# Altium PCB mpll31.PcbDoc (part 2 of 4)
Units mil, origin at the board's own origin, x right, y up, seen from the top; angles counter-clockwise.
Board outline 3925 x 3925 mil, 2 copper layers (TopLayer, BottomLayer); 92 components, 107 nets, 905 pads, 24 vias.
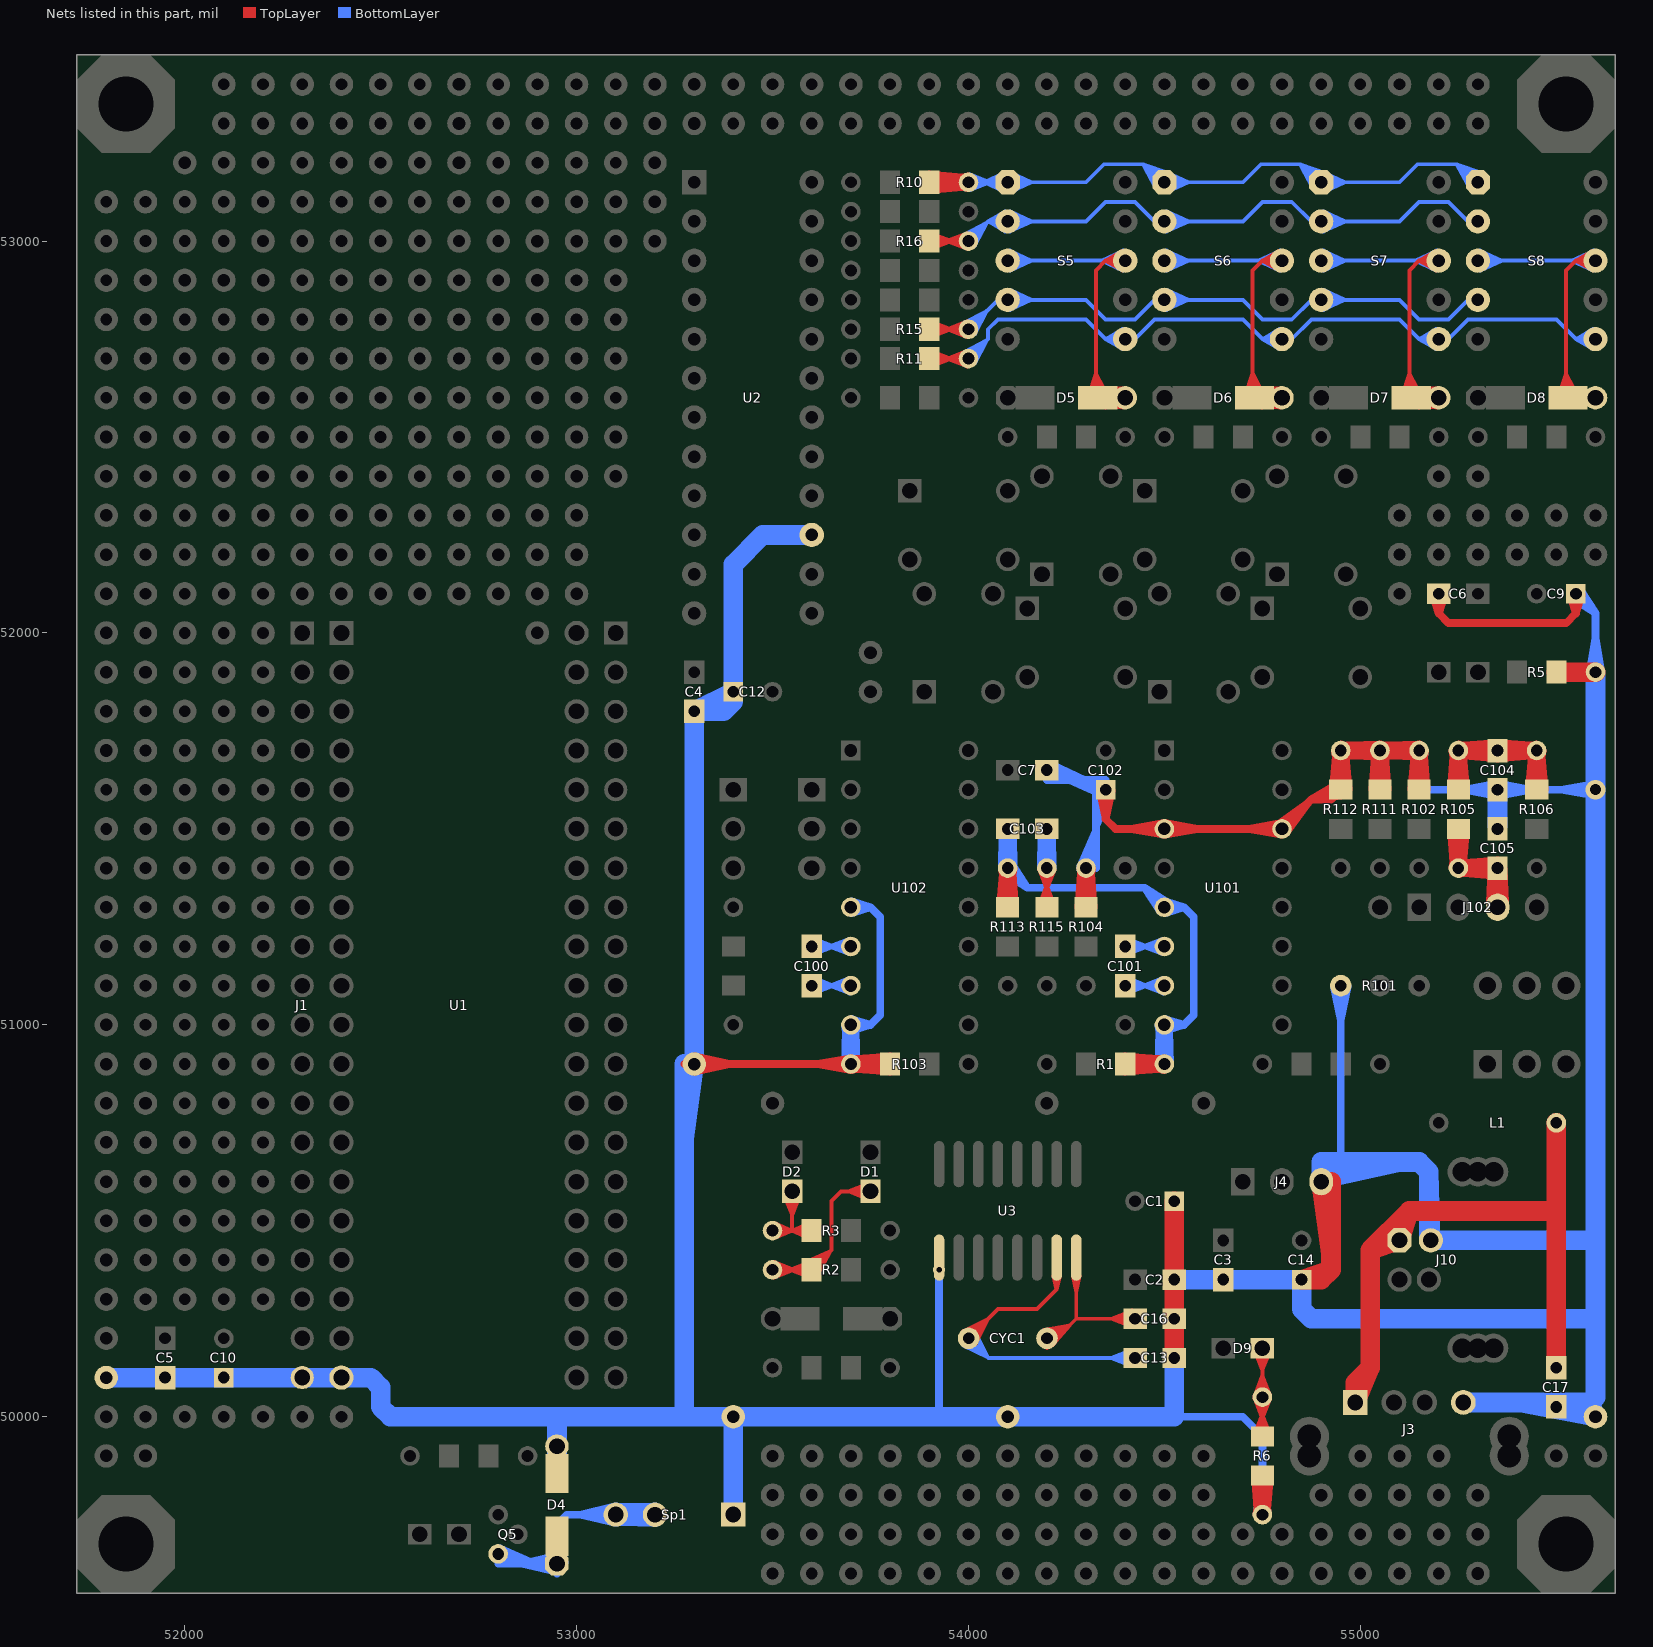
[diagram p2: the nets of this part, all layers, seen from the top]

## Via types
v1: diameter 50, hole 28, TopLayer to BottomLayer, 12 vias
v2: diameter 30, hole 14, TopLayer to BottomLayer, 8 vias
v3: diameter 40, hole 28, TopLayer to BottomLayer, 4 vias

## Nets (pads, with @x,y where several pads share a name; then routed paths per layer and width w, separated by ;. In a path a pad name is that pad's centre, name@x,y a point inside that pad or via, vN(x,y) a via of type N, cw(c..) or ccw(c..) an arc to the next point about the centre after c; other vN are vias at no path point) (continued)
DP: R11.2 R11.4 S5.6 S6.6 S7.6 S8.6 | length 4480.5
  TopLayer w10: R11.4@53900,52700 R11.2@54000,52700 53945,52700 ; R11.4@53901.01,52689.46 53955.59,52700 ; R11.4@53901.01,52710.54 53955.59,52700 ; R11.4@53903.81,52679.77 53955.59,52700 ; R11.4@53903.81,52720.23 53955.59,52700 ; R11.2@53996.36,52680.33 53945,52700 ; R11.2@53996.36,52719.67 53945,52700 ; R11.2@53999.09,52690.04 53945,52700 ; R11.2@53999.09,52709.96 53945,52700
  BottomLayer w10: R11.2@53988.19,52716.14 54046.21,52746.21 ; R11.2@53993.49,52707.59 54046.21,52746.21 ; R11.2@54000,52700 54050,52750 54050,52775 54075,52800 54300,52800 54350,52750 ; R11.2@54007.59,52693.49 54046.21,52746.21 ; R11.2@54016.14,52688.19 54046.21,52746.21 ; S5.6@54393.24,52724.89 54350,52750 ; S5.6@54393.24,52775.11 54350,52750 ; S5.6@54397.44,52734.21 54350,52750 ; S5.6@54397.44,52765.79 54350,52750 ; S5.6@54399.64,52744.01 54350,52750 ; S5.6@54399.64,52755.99 54350,52750 ; S6.6@54793.24,52724.89 54750,52750 ; S6.6@54793.24,52775.11 54750,52750 ; S6.6@54797.44,52734.21 54750,52750 ; S6.6@54797.44,52765.79 54750,52750 ; S6.6@54799.64,52744.01 54750,52750 ; S6.6@54799.64,52755.99 54750,52750 ; S8.6@55593.24,52724.89 55550,52750 ; S8.6@55593.24,52775.11 55550,52750 ; S8.6@55597.44,52734.21 55550,52750 ; S8.6@55597.44,52765.79 55550,52750 ; S8.6@55599.64,52744.01 55550,52750 ; S8.6@55599.64,52755.99 55550,52750 ; S8.6@55600,52750 55550,52750 ; 54350,52750 S5.6@54400,52750 ; 54350,52750 S5.6@54400,52750 ; S5.6@54400,52750 54425,52750 54475,52800 54700,52800 54750,52750 ; 54750,52750 S6.6@54800,52750 ; 54750,52750 S6.6@54800,52750 ; S6.6@54800,52750 54825,52750 54875,52800 55100,52800 ; 55100,52800 55150,52750 ; 55100,52800 55150,52750 ; 55150,52750 S7.6@55200,52750 ; 55150,52750 55199.64,52755.99 55150,52750 ; 55150,52750 55199.64,52744.01 55150,52750 ; 55150,52750 55197.44,52765.79 55150,52750 ; 55150,52750 55197.44,52734.21 55150,52750 ; 55150,52750 55193.24,52775.11 55150,52750 ; 55150,52750 55193.24,52724.89 55150,52750 ; 55150,52750 S7.6@55200,52750 ; 55150,52750 S7.6@55200,52750 ; 55150,52750 S7.6@55200,52750 ; S7.6@55200,52750 55225,52750 55275,52800 55500,52800 55550,52750
E: R15.2 R15.4 S5.4 S6.4 S7.4 S8.4 | length 3282.1
  TopLayer w10: R15.4@53900,52775 R15.2@54000,52775 ; R15.4@53901.01,52764.46 53955.59,52775 ; R15.4@53901.01,52785.54 53955.59,52775 ; R15.4@53903.81,52754.77 53955.59,52775 ; R15.4@53903.81,52795.23 53955.59,52775 ; R15.2@53996.36,52755.33 53945,52775 ; R15.2@53996.36,52794.67 53945,52775 ; R15.2@53999.09,52765.04 53945,52775 ; R15.2@53999.09,52784.96 53945,52775
  BottomLayer w10: R15.2@53988.19,52791.14 54046.21,52821.21 ; R15.2@53993.49,52782.59 54046.21,52821.21 ; R15.2@54000,52775 54075,52850 S5.4@54100,52850 54300,52850 54350,52800 54425,52800 S6.4@54475,52850 ; R15.2@54007.59,52768.49 54046.21,52821.21 ; R15.2@54016.14,52763.19 54046.21,52821.21 ; S5.4@54100.3,52844.01 54161,52850 ; S5.4@54100.3,52855.99 54161,52850 ; S5.4@54102.1,52834.14 54161,52850 ; S5.4@54102.1,52865.86 54161,52850 ; S5.4@54105.54,52824.6 54161,52850 ; S5.4@54105.54,52875.4 54161,52850 ; S6.4@54500,52850 54700,52850 54750,52800 54825,52800 S7.4@54875,52850 ; S6.4@54500.3,52844.01 54561,52850 ; S6.4@54500.3,52855.99 54561,52850 ; S6.4@54502.1,52834.14 54561,52850 ; S6.4@54502.1,52865.86 54561,52850 ; S6.4@54505.54,52824.6 54561,52850 ; S6.4@54505.54,52875.4 54561,52850 ; S7.4@54900,52850 55100,52850 55150,52800 55225,52800 S8.4@55275,52850 ; S7.4@54900.3,52844.01 54961,52850 ; S7.4@54900.3,52855.99 54961,52850 ; S7.4@54902.1,52834.14 54961,52850 ; S7.4@54902.1,52865.86 54961,52850 ; S7.4@54905.54,52824.6 54961,52850 ; S7.4@54905.54,52875.4 54961,52850
F: R16.2 R16.4 S5.2 S6.2 S7.2 S8.2 | length 3721.8
  TopLayer w10: R16.4@53900,53000 R16.2@54000,53000 ; R16.4@53901.01,52989.46 53955.59,53000 ; R16.4@53901.01,53010.54 53955.59,53000 ; R16.4@53903.81,52979.77 53955.59,53000 ; R16.4@53903.81,53020.23 53955.59,53000 ; R16.2@53996.36,52980.33 53945,53000 ; R16.2@53996.36,53019.67 53945,53000 ; R16.2@53999.09,52990.04 53945,53000 ; R16.2@53999.09,53009.96 53945,53000
  BottomLayer w10: R16.2@53988.19,53016.14 54046.21,53046.21 ; R16.2@53993.49,53007.59 54046.21,53046.21 ; R16.2@54000,53000 54050,53050 ; R16.2@54007.59,52993.49 54046.21,53046.21 ; R16.2@54016.14,52988.19 54046.21,53046.21 ; S5.2@54075,53050 S5.2@54100,53050 ; S5.2@54093.24,53024.89 54050,53050 ; S5.2@54093.24,53075.11 54050,53050 ; S5.2@54097.44,53034.21 54050,53050 ; S5.2@54097.44,53065.79 54050,53050 ; S5.2@54099.64,53044.01 54050,53050 ; S5.2@54099.64,53055.99 54050,53050 ; S5.2@54100.3,53044.01 54161,53050 ; S5.2@54100.3,53055.99 54161,53050 ; S5.2@54102.1,53034.14 54161,53050 ; S5.2@54102.1,53065.86 54161,53050 ; S5.2@54105.54,53024.6 54161,53050 ; S5.2@54105.54,53075.4 54161,53050 ; S6.2@54500.3,53044.01 54561,53050 ; S6.2@54500.3,53055.99 54561,53050 ; S6.2@54502.1,53034.14 54561,53050 ; S6.2@54502.1,53065.86 54561,53050 ; S6.2@54505.54,53024.6 54561,53050 ; S6.2@54505.54,53075.4 54561,53050 ; S7.2@54900.3,53044.01 54961,53050 ; S7.2@54900.3,53055.99 54961,53050 ; S7.2@54902.1,53034.14 54961,53050 ; S7.2@54902.1,53065.86 54961,53050 ; S7.2@54905.54,53024.6 54961,53050 ; S7.2@54905.54,53075.4 54961,53050 ; S8.2@55300,53050 55275,53050 55225,53100 55150,53100 55100,53050 S7.2@54900,53050 54875,53050 54825,53100 54750,53100 54700,53050 S6.2@54500,53050 54475,53050 54425,53100 54350,53100 54300,53050 S5.2@54100,53050 ; 54050,53050 S5.2@54100,53050 ; 54050,53050 S5.2@54100,53050
G: R10.2 R10.4 S5.1 S6.1 S7.1 S8.1 | length 5558.1
  TopLayer w20: R10.4@53899.85,53130.47 R10.2@53985.17,53137.47 ; R10.4@53899.85,53169.53 R10.2@53985.17,53162.53 ; R10.4@53900,53146.06 R10.2@53985.17,53137.47 ; R10.4@53900,53150 R10.2@54000,53150 ; R10.4@53900,53153.94 R10.2@53985.17,53162.53 ; R10.4@53901.42,53134.47 53985.59,53150 R10.4@53901.42,53165.53 ; R10.4@53902.97,53138.63 R10.2@53985.17,53162.53 ; R10.4@53902.97,53161.37 R10.2@53985.17,53137.47 ; R10.2@53998.68,53135.06 53915,53150 R10.2@53998.68,53164.94
  BottomLayer w10: R10.2@54000,53150 S5.1@54100,53150 ; R10.2@54000.91,53140.04 54055,53150 ; R10.2@54000.91,53159.96 54055,53150 ; R10.2@54003.64,53130.33 54055,53150 ; R10.2@54003.64,53169.67 54055,53150 ; S5.1@54092,53150 S5.1@54100,53150 ; S5.1@54094.46,53124.6 54039,53150 ; S5.1@54094.46,53175.4 54039,53150 ; S5.1@54097.9,53134.14 54039,53150 ; S5.1@54097.9,53165.86 54039,53150 ; S5.1@54099.7,53144.01 54039,53150 ; S5.1@54099.7,53155.99 54039,53150 ; S5.1@54100.3,53144.01 54161,53150 ; S5.1@54100.3,53155.99 54161,53150 ; S5.1@54102.1,53134.14 54161,53150 ; S5.1@54102.1,53165.86 54161,53150 ; S5.1@54105.54,53124.6 54161,53150 ; S5.1@54105.54,53175.4 54161,53150 ; S6.1@54479.8,53133.63 54446.02,53195.98 ; S6.1@54488.32,53139.07 54446.02,53195.98 ; S6.1@54495.92,53145.6 54446.02,53195.98 ; S6.1@54500.3,53144.01 54561,53150 ; S6.1@54500.3,53155.99 54561,53150 ; S6.1@54502.1,53134.14 54561,53150 ; S6.1@54502.1,53165.86 54561,53150 ; S6.1@54503.69,53154.73 54446.02,53195.98 ; S6.1@54505.54,53124.6 54561,53150 ; S6.1@54505.54,53175.4 54561,53150 ; S6.1@54508.93,53163.27 54446.02,53195.98 ; S6.1@54512.94,53172.55 54446.02,53195.98 ; S7.1@54879.8,53133.63 54846.02,53195.98 ; S7.1@54888.32,53139.07 54846.02,53195.98 ; S7.1@54895.92,53145.6 54846.02,53195.98 ; S7.1@54900.3,53144.01 54961,53150 ; S7.1@54900.3,53155.99 54961,53150 ; S7.1@54902.1,53134.14 54961,53150 ; S7.1@54902.1,53165.86 54961,53150 ; S7.1@54903.69,53154.73 54846.02,53195.98 ; S7.1@54905.54,53124.6 54961,53150 ; S7.1@54905.54,53175.4 54961,53150 ; S7.1@54908.93,53163.27 54846.02,53195.98 ; S7.1@54912.94,53172.55 54846.02,53195.98 ; S8.1@55279.8,53133.63 55246.02,53195.98 ; S8.1@55288.32,53139.07 55246.02,53195.98 ; S8.1@55295.92,53145.6 55246.02,53195.98 ; S8.1@55303.69,53154.73 55246.02,53195.98 ; S8.1@55308.93,53163.27 55246.02,53195.98 ; S8.1@55312.94,53172.55 55246.02,53195.98 ; S5.1@54100,53150 54300,53150 54346,53196 54446,53196 ; 54446.02,53195.98 S6.1@54500,53150 ; 54446,53196 54492,53150 S6.1@54500,53150 ; S6.1@54500,53150 54700,53150 54746,53196 54750,53196 54846,53196 ; 54846.02,53195.98 S7.1@54900,53150 ; 54846,53196 S7.1@54892,53150 ; S7.1@54892,53150 S7.1@54900,53150 ; S7.1@54892,53150 S7.1@54900,53150 ; S7.1@54900,53150 55100,53150 55146,53196 55150,53196 55246,53196 ; 55246.02,53195.98 S8.1@55300,53150 55292,53150 55246,53196
GND: C1.1 C2.2 C3.2 C4.2 C5.2 C6.2 C7.2 C9.1 C10.1 C12.1 C13.2 C14.1 C16.2 C17.2 C102.1 C103.1 C104.2 C105.2 D4.2 D4.4 J1.20 J3.4 J4.3 J10.4 pad.0@53400,50000 pad.1@54100,50000 pad.30@53300,50900 pad.45@55600,50000 pad.55 R1.2 R1.4 R5.1 R5.3 R6.1 R6.3 R101.1 R102.1 R102.3 R103.1 R103.3 R104.1 R104.3 R111.1 R111.3 R112.1 R112.3 R113.2 R113.4 Sp1.1 U1.20 U2.15 U3.1 U101.3 U101.5 U101.8 U101.14 U102.5 U102.8 | length 37944.9
  TopLayer w20: pad.30@53275,50900 pad.30@53300,50900 R103.1@53700,50900 R103.3@53800,50900 ; pad.30@53302.22,50880.12 53390,50900 pad.30@53302.22,50919.88 ; R103.1@53698.68,50885.06 53615,50900 R103.1@53698.68,50914.94 ; R103.1@53701.32,50885.06 53785,50900 R103.1@53701.32,50914.94 ; R103.3@53797.03,50888.63 R103.1@53714.83,50912.53 ; R103.3@53797.03,50911.37 R103.1@53714.83,50887.47 ; R103.3@53798.58,50884.47 53714.41,50900 R103.3@53798.58,50915.53 ; R103.3@53800,50896.06 R103.1@53714.83,50887.47 ; R103.3@53800,50903.94 R103.1@53714.83,50912.53 ; R103.3@53800.15,50880.47 R103.1@53714.83,50887.47 ; R103.3@53800.15,50919.53 R103.1@53714.83,50912.53 ; R113.4@54080.47,51299.85 R113.2@54087.47,51385.17 ; R113.4@54084.47,51301.42 54100,51385.59 R113.4@54115.53,51301.42 ; R113.2@54085.06,51398.68 54100,51315 R113.2@54114.94,51398.68 ; R113.4@54088.63,51302.97 R113.2@54112.53,51385.17 ; R113.4@54096.06,51300 R113.2@54087.47,51385.17 ; R113.4@54100,51300 R113.2@54100,51400 ; R113.4@54103.94,51300 R113.2@54112.53,51385.17 ; R113.4@54111.37,51302.97 R113.2@54087.47,51385.17 ; R113.4@54119.53,51299.85 R113.2@54112.53,51385.17 ; R104.3@54280.47,51299.85 R104.1@54287.47,51385.17 ; R104.3@54284.47,51301.42 54300,51385.59 R104.3@54315.53,51301.42 ; R104.1@54285.06,51398.68 54300,51315 R104.1@54314.94,51398.68 ; R104.3@54288.63,51302.97 R104.1@54312.53,51385.17 ; R104.3@54296.06,51300 R104.1@54287.47,51385.17 ; R104.3@54300,51300 R104.1@54300,51400 ; R104.3@54303.94,51300 R104.1@54312.53,51385.17 ; R104.3@54311.37,51302.97 R104.1@54287.47,51385.17 ; R104.3@54319.53,51299.85 R104.1@54312.53,51385.17 ; C102.1@54335.08,51598.5 54350,51525 ; C102.1@54350,51600 54350,51525 ; C102.1@54364.92,51598.5 54350,51525 ; R1.4@54399.85,50880.47 R1.2@54485.17,50887.47 ; R1.4@54399.85,50919.53 R1.2@54485.17,50912.53 ; R1.4@54400,50896.06 R1.2@54485.17,50887.47 ; R1.4@54400,50900 R1.2@54500,50900 ; R1.4@54400,50903.94 R1.2@54485.17,50912.53 ; R1.4@54401.42,50884.47 54485.59,50900 R1.4@54401.42,50915.53 ; R1.4@54402.97,50888.63 R1.2@54485.17,50912.53 ; R1.4@54402.97,50911.37 R1.2@54485.17,50887.47 ; R1.2@54498.68,50885.06 54415,50900 R1.2@54498.68,50914.94 ; U101.3@54498.68,51485.06 54415,51500 U101.3@54498.68,51514.94 ; U101.3@54501.32,51485.06 54585,51500 U101.3@54501.32,51514.94 ; R6.3@54730.47,49850.15 R6.1@54737.47,49764.83 ; R6.3@54734.47,49848.58 54750,49764.41 R6.3@54765.53,49848.58 ; R6.1@54735.06,49751.32 54750,49835 R6.1@54764.94,49751.32 ; R6.3@54738.63,49847.03 R6.1@54762.53,49764.83 ; R6.3@54746.06,49850 R6.1@54737.47,49764.83 ; R6.1@54750,49750 R6.3@54750,49850 ; R6.3@54753.94,49850 R6.1@54762.53,49764.83 ; R6.3@54761.37,49847.03 R6.1@54737.47,49764.83 ; R6.3@54769.53,49850.15 R6.1@54762.53,49764.83 ; U101.14@54790.26,51511.41 54867.43,51567.43 U101.14@54811.41,51490.26 ; U101.14@54798.68,51485.06 54715,51500 U101.14@54798.68,51514.94 ; R112.3@54930.47,51599.85 R112.1@54937.47,51685.17 ; R112.3@54934.47,51601.42 54950,51685.59 R112.3@54965.53,51601.42 ; R112.1@54935.06,51698.68 54950,51615 R112.1@54964.94,51698.68 ; R112.3@54938.63,51602.97 R112.1@54962.53,51685.17 ; R112.3@54939.4,51614.09 54875,51575 ; R112.3@54949.69,51584.84 54875,51575 ; R112.1@54951.32,51685.06 55035,51700 R112.1@54951.32,51714.94 ; R112.3@54953.94,51600 R112.1@54962.53,51685.17 ; R112.3@54961.37,51602.97 R112.1@54937.47,51685.17 ; R112.3@54969.53,51599.85 R112.1@54962.53,51685.17 ; R111.3@55030.47,51599.85 R111.1@55037.47,51685.17 ; R111.3@55034.47,51601.42 55050,51685.59 R111.3@55065.53,51601.42 ; R111.1@55035.06,51698.68 55050,51615 R111.1@55064.94,51698.68 ; R111.3@55038.63,51602.97 R111.1@55062.53,51685.17 ; R111.3@55046.06,51600 R111.1@55037.47,51685.17 ; R111.1@55046.53,51685.41 R112.1@54965.41,51712.43 ; R111.1@55046.53,51714.59 R112.1@54965.41,51687.57 ; R111.1@55048.68,51685.06 54965,51700 R111.1@55048.68,51714.94 ; R111.3@55050,51600 R111.1@55050,51700 ; R111.1@55050.87,51685.03 R112.1@54965.41,51687.57 ; R111.1@55050.87,51714.97 R112.1@54965.41,51712.43 ; R111.1@55051.32,51685.06 55135,51700 R111.1@55051.32,51714.94 ; R111.3@55053.94,51600 R111.1@55062.53,51685.17 ; R111.3@55061.37,51602.97 R111.1@55037.47,51685.17 ; R111.3@55069.53,51599.85 R111.1@55062.53,51685.17 ; R102.3@55130.47,51599.85 R102.1@55137.47,51685.17 ; R102.3@55134.47,51601.42 55150,51685.59 R102.3@55165.53,51601.42 ; R102.1@55135.06,51698.68 55150,51615 R102.1@55164.94,51698.68 ; R102.3@55138.63,51602.97 R102.1@55162.53,51685.17 ; R102.3@55146.06,51600 R102.1@55137.47,51685.17 ; R102.1@55146.53,51685.41 R111.1@55065.41,51712.43 ; R102.1@55146.53,51714.59 R111.1@55065.41,51687.57 ; R102.1@55148.68,51685.06 55065,51700 R102.1@55148.68,51714.94 ; R102.3@55150,51600 R102.1@55150,51700 ; R102.1@55150.87,51685.03 R111.1@55065.41,51687.57 ; R102.1@55150.87,51714.97 R111.1@55065.41,51712.43 ; R102.3@55153.94,51600 R102.1@55162.53,51685.17 ; R102.3@55161.37,51602.97 R102.1@55137.47,51685.17 ; R102.3@55169.53,51599.85 R102.1@55162.53,51685.17 ; C6.2@55184.21,52097.44 55200,52050 ; C6.2@55200,52100 55200,52050 ; C6.2@55215.79,52097.44 55200,52050 ; C9.1@55535.17,52097.75 55550,52050 ; C9.1@55550,52100 55550,52050 ; C9.1@55564.83,52097.75 55550,52050 ; 54350,51525 54375,51500 U101.3@54500,51500 U101.14@54800,51500 54875,51575 ; 54875,51575 54946.06,51600 R112.1@54937.47,51685.17 ; 54875,51575 54925,51575 R112.3@54950,51600 R112.1@54950,51700 R111.1@55050,51700 ; R112.1@54965.41,51687.57 R111.1@55050,51700 ; R112.1@54965.41,51712.43 R111.1@55050,51700 ; R111.1@55050,51700 R102.1@55150,51700 ; R111.1@55065.41,51687.57 R102.1@55150,51700 ; R111.1@55065.41,51712.43 R102.1@55150,51700 ; 55200,52050 55225,52025 55525,52025 55550,52050
  TopLayer w50: C13.2@54525,50150 C1.1@54525,50525 ; C2.2@54525,50375 C1.1@54525,50550 ; J4.3@54900,50595 54925,50409.13 ; J4.3@54925,50600 54925,50375 ; R5.3@55500,51900 R5.1@55600,51900 ; C14.1@54850,50350 54900,50350 ; C14.1@54850,50350 54925,50375 ; C14.1@54850,50350 54900,50350 ; 54900,50350 54925,50375
  BottomLayer w20: R103.1@53685.03,50899.13 U102.8@53687.57,50984.59 ; R103.1@53685.06,50901.32 53700,50985 R103.1@53714.94,50901.32 ; U102.8@53685.06,50998.68 53700,50915 U102.8@53714.94,50998.68 ; R103.1@53685.41,50903.47 U102.8@53712.43,50984.59 ; U102.5@53700,51300 53750,51300 ; U102.8@53702.25,50985.17 53750,51000 ; U102.8@53702.25,51014.83 53750,51000 ; U102.5@53702.25,51285.17 53750,51300 ; U102.5@53702.25,51314.83 53750,51300 ; R103.1@53714.59,50903.47 U102.8@53687.57,50984.59 ; R103.1@53714.97,50899.13 U102.8@53712.43,50984.59 ; 53925,50025 v2(53925,50375) ; C103.1@54084.07,51498.51 54100,51414 C103.1@54115.93,51498.51 ; R113.2@54085.03,51398.98 C103.1@54086.71,51484.48 ; R113.2@54085.06,51401.32 54100,51485 R113.2@54114.94,51401.32 ; R113.2@54085.44,51403.62 C103.1@54113.29,51484.48 ; R113.2@54090.58,51388.33 54150,51350 ; C103.1@54100,51500 R113.2@54100,51400 ; R113.2@54111.67,51409.42 54150,51350 ; R113.2@54114.56,51403.62 C103.1@54086.71,51484.48 ; R113.2@54114.97,51398.98 C103.1@54113.29,51484.48 ; C7.2@54200,51625 54350,51625 ; C7.2@54201.12,51634.26 54296.06,51625 ; C7.2@54204,51650 54296.06,51625 ; C7.2@54209.47,51665.03 54296.06,51625 ; R104.1@54285.17,51397.75 54300,51350 ; R104.1@54285.86,51405 54325,51493.22 ; R104.1@54314.75,51397.25 54325,51493.22 ; R104.1@54314.83,51397.75 54300,51350 ; 54325,51400 C102.1@54325,51600 ; C102.1@54335.25,51602.75 54325,51506.78 ; C102.1@54344.97,51585.87 54257.46,51625 ; C102.1@54352.77,51614.74 54257.46,51625 ; C102.1@54364.14,51595 54325,51506.78 ; R1.2@54485.03,50899.13 U101.8@54487.57,50984.59 ; R1.2@54485.06,50901.32 54500,50985 R1.2@54514.94,50901.32 ; U101.8@54485.06,50998.68 54500,50915 U101.8@54514.94,50998.68 ; R1.2@54485.41,50903.47 U101.8@54512.43,50984.59 ; U101.5@54488.33,51290.58 54450,51350 ; U101.8@54502.25,50985.17 54550,51000 ; U101.8@54502.25,51014.83 54550,51000 ; U101.5@54502.25,51285.17 54550,51300 ; U101.5@54502.25,51314.83 54550,51300 ; U101.5@54509.42,51311.67 54450,51350 ; R1.2@54514.59,50903.47 U101.8@54487.57,50984.59 ; R1.2@54514.97,50899.13 U101.8@54512.43,50984.59 ; 54525,50000 54700,50000 54750,49950 R6.1@54750,49750 ; R6.1@54735.06,49751.32 54750,49835 R6.1@54764.94,49751.32 ; R101.1@54932.59,51098.25 54950,51012.5 R101.1@54967.41,51098.25 ; 54950,50650 R101.1@54950,51100 ; R102.1@55135.08,51698.5 55150,51625 ; R102.1@55150,51700 55150,51625 ; R102.1@55164.92,51698.5 55150,51625 ; C105.2@55334.07,51505.49 C104.2@55350,51590 ; C104.2@55334.05,51597.29 C105.2@55335.06,51510.77 ; C104.2@55334.56,51591.79 C105.2@55364.94,51510.77 ; C104.2@55348.51,51584.07 55264,51600 C104.2@55348.51,51615.93 ; C105.2@55350,51500 C104.2@55350,51600 ; C105.2@55350,51504 C104.2@55350,51590 ; C104.2@55351.49,51584.07 55436,51600 C104.2@55351.49,51615.93 ; C104.2@55365.44,51591.79 C105.2@55335.06,51510.77 ; C105.2@55365.93,51505.49 C104.2@55350,51590 ; C104.2@55365.95,51597.29 C105.2@55364.94,51510.77 ; C9.1@55540.58,52088.33 55600,52050 ; C9.1@55550,52100 55600,52050 ; C9.1@55561.67,52109.42 55600,52050 ; R5.1@55585.06,51901.32 55600,51985 R5.1@55614.94,51901.32 ; v1@55598.74,51585.05 55511,51600 v1@55598.74,51614.95 ; v1(55600,51600) C104.2@55350,51600 ; R5.1@55600,51900 55600,52050 ; U102.8@53687.57,50984.59 R103.1@53700,50900 ; R103.1@53700,50900 U102.8@53712.43,50984.59 ; R103.1@53700,50900 U102.8@53700,51000 53750,51000 ; 53750,51000 53775,51025 53775,51275 53750,51300 ; C103.1@54086.71,51484.48 R113.2@54100,51400 ; R113.2@54100,51400 C103.1@54113.29,51484.48 ; R113.2@54100,51400 54150,51350 ; 54150,51350 54300,51350 ; 54257.46,51625 C102.1@54350,51600 54325,51506.78 ; 54300,51350 54450,51350 ; 54300,51350 R104.1@54300,51400 54325,51493.22 ; 54450,51350 U101.5@54500,51300 ; 54450,51350 U101.5@54500,51300 ; U101.8@54487.57,50984.59 R1.2@54500,50900 ; R1.2@54500,50900 U101.8@54512.43,50984.59 ; R1.2@54500,50900 U101.8@54500,51000 54550,51000 ; U101.5@54500,51300 54550,51300 ; 54550,51000 54575,51025 54575,51275 54550,51300 ; 55150,51625 55175,51600 C104.2@55350,51600 ; C105.2@55335.06,51510.77 C104.2@55350,51596 ; C105.2@55350,51510 C104.2@55350,51596 ; C105.2@55350,51510 55334.07,51594.51 C105.2@55350,51510 ; C105.2@55350,51510 55365.93,51594.51 C105.2@55350,51510 ; C105.2@55350,51510 C104.2@55350,51596 ; C104.2@55350,51596 C105.2@55364.94,51510.77
  BottomLayer w30: 55586.42,50036.42 pad.45@55600,50000 55600,50050 55586.42,50036.42
  BottomLayer w50: pad.55@51800,50100 52150,50100 J1.20@52300,50100 U1.20@52400,50100 52475,50100 52500,50075 52500,50025 52525,50000 53000,50000 ; 52875,50000 53000,50000 ; D4.2@52950,49900 52950,50000 D4.2@52950,49925 ; 53275,50711.48 pad.30@53300,50900 53300,51080 ; pad.30@53275,50900 53275,50000 ; pad.30@53300,50925 C4.2@53300,51800 ; 53300,51620 C4.2@53300,51796 ; pad.0@53375,50000 53275,50000 ; Sp1.1@53399.91,49750.33 53400,49931.33 ; Sp1.1@53400,49750.42 pad.0@53400,50000 ; C12.1@53400,51825 53375,51800 ; C13.2@54525,50150 54525,50000 pad.1@54100,50000 pad.0@53400,50000 ; C2.2@54525,50350 C3.2@54650,50350 ; C2.2@54529,50350 C3.2@54650,50350 ; 55103.25,50650 54900,50605 54900,50650 55150,50650 55175,50625 ; J10.4@55175,50450 55175,50625 ; J3.4@55262.8,50036.42 55586.42,50036.42 ; 55405.27,50036.42 pad.45@55600,50000 ; 55575,50250 54875,50250 54850,50275 ; 55575,50450 J10.4@55180,50450 55175,50625 ; 55600,50050 v1(55600,51600) R5.1@55600,51900 ; 53000,50000 53275,50000 ; 53275,50000 pad.0@53400,50000 ; 53275,50000 pad.0@53400,50000 ; C4.2@53300,51800 C12.1@53400,51850 ; C4.2@53300,51800 53375,51800 ; 53375,51800 C12.1@53400,51850 ; 53375,51800 C12.1@53400,51850 ; C12.1@53400,51850 53400,52175 53475,52250 ; 53475,52250 U2.15@53600,52250 53475,52250 ; C3.2@54650,50350 C14.1@54850,50350 ; 54850,50275 C14.1@54850,50350 ; 54850,50275 C14.1@54850,50350 ; 55586.42,50036.42 pad.45@55600,50000 ; 55586.42,50036.42 pad.45@55600,50000 ; 55586.42,50036.42 55500,50029 pad.45@55600,50000
NetC13_1: C13.1 CYC1.2 U3.7 | length 1740.2
  TopLayer w10: CYC1.2@53987.35,50218.36 54049.16,50248.78 ; CYC1.2@53992.45,50209.67 54049.16,50248.78 ; CYC1.2@54000.45,50200.07 54075.38,50275 54175,50275 54225,50325 ; CYC1.2@54010.05,50192.07 54049.16,50248.78 ; CYC1.2@54018.74,50186.97 54049.16,50248.78 ; U3.7@54216.56,50359.48 54225,50325 ; U3.7@54225,50360.5 54225,50325 ; U3.7@54225,50406 54225,50325 ; U3.7@54233.44,50359.48 54225,50325
  BottomLayer w10: CYC1.2@53987.35,50181.78 54049.16,50151.36 ; CYC1.2@53992.45,50190.47 54049.16,50151.36 ; CYC1.2@54000.45,50200.07 54050.52,50150 C13.1@54425,50150 ; CYC1.2@54010.05,50208.07 54049.16,50151.36 ; CYC1.2@54018.74,50213.17 54049.16,50151.36 ; C13.1@54417.06,50129.37 54365,50150 ; C13.1@54417.06,50170.63 54365,50150 ; C13.1@54419.92,50139.05 54365,50150 ; C13.1@54419.92,50160.95 54365,50150 ; C13.1@54421,50150 54365,50150
NetC16_1: C16.1 CYC1.1 U3.8 | length 1151.9
  TopLayer w10: CYC1.1@54192.79,50221.23 54257.78,50232.78 ; CYC1.1@54195.31,50211.46 54257.78,50232.78 ; CYC1.1@54200.45,50175.45 54275,50250 ; CYC1.1@54200.45,50200.07 54257.78,50232.78 ; CYC1.1@54207.64,50189.85 54257.78,50232.78 ; CYC1.1@54214.77,50182.71 54257.78,50232.78 ; U3.8@54266.54,50359.67 54275,50317 ; U3.8@54275,50360.5 54275,50317 ; U3.8@54275,50406 54275,50250 ; U3.8@54283.46,50359.67 54275,50317 ; C16.1@54417.06,50229.37 54365,50250 ; C16.1@54417.06,50270.63 54365,50250 ; C16.1@54419.92,50239.05 54365,50250 ; C16.1@54419.92,50260.95 54365,50250 ; C16.1@54421,50250 54365,50250 ; C16.1@54425,50250 54275,50250
NetC17_1: C17.1 J3.1 J10.1 L1.1 | length 2026.9
  TopLayer w50: C17.1@55500,50125 L1.1@55500,50750 ; C17.1@55500,50129 55500,50305 ; 55500,50525 55125,50525 ; J3.1@54987.2,50036.42 54987.2,50087.2 ; J3.1@54987.2,50036.42 55025,50125 ; J3.1@54987.2,50036.42 54987.2,50087.2 ; 54987.2,50087.2 55025,50125 ; 55025,50125 55025,50425 ; 55025,50425 J10.1@55100,50450 55125,50525 ; 55025,50425 55125,50525
NetC100_1: C100.1 U102.7 | length 544
  BottomLayer w10: C100.1@53600,51100 U102.7@53700,51100 ; C100.1@53601.08,51089.05 53656,51100 ; C100.1@53601.08,51110.95 53656,51100 ; C100.1@53603.94,51079.37 53656,51100 ; C100.1@53603.94,51120.63 53656,51100 ; U102.7@53696.36,51080.33 53645,51100 ; U102.7@53696.36,51119.67 53645,51100 ; U102.7@53699.09,51090.04 53645,51100 ; U102.7@53699.09,51109.96 53645,51100
NetC100_2: C100.2 U102.6 | length 544
  BottomLayer w10: C100.2@53600,51200 U102.6@53700,51200 ; C100.2@53601.08,51189.05 53656,51200 ; C100.2@53601.08,51210.95 53656,51200 ; C100.2@53603.94,51179.37 53656,51200 ; C100.2@53603.94,51220.63 53656,51200 ; U102.6@53696.36,51180.33 53645,51200 ; U102.6@53696.36,51219.67 53645,51200 ; U102.6@53699.09,51190.04 53645,51200 ; U102.6@53699.09,51209.96 53645,51200
NetC101_1: C101.1 U101.7 | length 544
  BottomLayer w10: C101.1@54400,51100 U101.7@54500,51100 ; C101.1@54401.08,51089.05 54456,51100 ; C101.1@54401.08,51110.95 54456,51100 ; C101.1@54403.94,51079.37 54456,51100 ; C101.1@54403.94,51120.63 54456,51100 ; U101.7@54496.36,51080.33 54445,51100 ; U101.7@54496.36,51119.67 54445,51100 ; U101.7@54499.09,51090.04 54445,51100 ; U101.7@54499.09,51109.96 54445,51100
NetC101_2: C101.2 U101.6 | length 544
  BottomLayer w10: C101.2@54400,51200 U101.6@54500,51200 ; C101.2@54401.08,51189.05 54456,51200 ; C101.2@54401.08,51210.95 54456,51200 ; C101.2@54403.94,51179.37 54456,51200 ; C101.2@54403.94,51220.63 54456,51200 ; U101.6@54496.36,51180.33 54445,51200 ; U101.6@54496.36,51219.67 54445,51200 ; U101.6@54499.09,51190.04 54445,51200 ; U101.6@54499.09,51209.96 54445,51200
NetC103_2: C103.2 R115.1 R115.3 | length 1497.5
  TopLayer w10: R115.3@54179.77,51303.81 54200,51355.59 ; R115.1@54180.33,51396.36 54200,51345 ; R115.3@54189.46,51301.01 54200,51355.59 ; R115.1@54190.04,51399.09 54200,51345 ; R115.3@54200,51300 R115.1@54200,51400 ; R115.1@54209.96,51399.09 54200,51345 ; R115.3@54210.54,51301.01 54200,51355.59 ; R115.1@54219.67,51396.36 54200,51345 ; R115.3@54220.23,51303.81 54200,51355.59
  BottomLayer w20: C103.2@54184.07,51498.51 54200,51414 C103.2@54215.93,51498.51 ; R115.1@54185.03,51398.98 C103.2@54186.71,51484.48 ; R115.1@54185.06,51401.32 54200,51485 R115.1@54214.94,51401.32 ; R115.1@54185.44,51403.62 C103.2@54213.29,51484.48 ; C103.2@54200,51500 R115.1@54200,51400 ; R115.1@54214.56,51403.62 C103.2@54186.71,51484.48 ; R115.1@54214.97,51398.98 C103.2@54213.29,51484.48 ; C103.2@54186.71,51484.48 R115.1@54200,51400 ; R115.1@54200,51400 C103.2@54213.29,51484.48
NetC104_1: C104.1 R105.1 R105.3 R106.2 R106.4 | length 3825.5
  TopLayer w20: R105.3@55230.47,51599.85 R105.1@55237.47,51685.17 ; R105.3@55234.47,51601.42 55250,51685.59 R105.3@55265.53,51601.42 ; R105.1@55235.06,51698.68 55250,51615 R105.1@55264.94,51698.68 ; R105.3@55238.63,51602.97 R105.1@55262.53,51685.17 ; R105.3@55246.06,51600 R105.1@55237.47,51685.17 ; R105.3@55250,51600 R105.1@55250,51700 C104.1@55350,51700 R106.2@55450,51700 R106.4@55450,51600 ; R105.1@55251.32,51685.06 55335,51700 R105.1@55251.32,51714.94 ; R105.3@55253.94,51600 R105.1@55262.53,51685.17 ; R105.3@55261.37,51602.97 R105.1@55237.47,51685.17 ; R105.3@55269.53,51599.85 R105.1@55262.53,51685.17 ; C104.1@55346.93,51688.3 R105.1@55264.43,51712.6 ; C104.1@55346.93,51711.7 R105.1@55264.43,51687.4 ; C104.1@55348.51,51684.07 55264,51700 C104.1@55348.51,51715.93 ; C104.1@55349.89,51680 R106.2@55435.57,51687.4 ; C104.1@55349.89,51720 R106.2@55435.57,51712.6 ; C104.1@55350.11,51680 R105.1@55264.43,51687.4 ; C104.1@55350.11,51720 R105.1@55264.43,51712.6 ; C104.1@55351.49,51684.07 55436,51700 C104.1@55351.49,51715.93 ; C104.1@55353.07,51688.3 R106.2@55435.57,51712.6 ; C104.1@55353.07,51711.7 R106.2@55435.57,51687.4 ; R106.4@55430.47,51599.85 R106.2@55437.47,51685.17 ; R106.4@55434.47,51601.42 55450,51685.59 R106.4@55465.53,51601.42 ; R106.2@55435.06,51698.68 55450,51615 R106.2@55464.94,51698.68 ; R106.4@55438.63,51602.97 R106.2@55462.53,51685.17 ; R106.4@55446.06,51600 R106.2@55437.47,51685.17 ; R106.2@55448.68,51685.06 55365,51700 R106.2@55448.68,51714.94 ; R106.4@55453.94,51600 R106.2@55462.53,51685.17 ; R106.4@55461.37,51602.97 R106.2@55437.47,51685.17 ; R106.4@55469.53,51599.85 R106.2@55462.53,51685.17 ; R105.1@55264.43,51687.4 55350,51696 R106.2@55435.57,51687.4 ; R105.1@55264.43,51712.6 55350,51704 R106.2@55435.57,51712.6
NetC105_1: C105.1 J102.3 R105.2 R105.4 | length 3319.5
  TopLayer w20: R105.4@55230.47,51500.15 R105.2@55237.47,51414.83 ; R105.4@55234.47,51498.58 55250,51414.41 R105.4@55265.53,51498.58 ; R105.2@55235.06,51401.32 55250,51485 R105.2@55264.94,51401.32 ; R105.4@55238.63,51497.03 R105.2@55262.53,51414.83 ; R105.4@55246.06,51500 R105.2@55237.47,51414.83 ; R105.4@55250,51500 R105.2@55250,51400 C105.1@55350,51400 J102.3@55350,51300 ; R105.2@55251.32,51385.06 55335,51400 R105.2@55251.32,51414.94 ; R105.4@55253.94,51500 R105.2@55262.53,51414.83 ; R105.4@55261.37,51497.03 R105.2@55237.47,51414.83 ; R105.4@55269.53,51500.15 R105.2@55262.53,51414.83 ; J102.3@55330.12,51307.22 C105.1@55350,51395 ; C105.1@55334.13,51398.04 J102.3@55331.05,51311.31 ; C105.1@55334.77,51391.08 J102.3@55368.95,51311.31 ; C105.1@55346.93,51388.3 R105.2@55264.43,51412.6 ; C105.1@55346.93,51411.7 R105.2@55264.43,51387.4 ; C105.1@55348.51,51384.07 55264,51400 C105.1@55348.51,51415.93 ; J102.3@55350,51305 C105.1@55350,51395 ; C105.1@55350,51404 R105.2@55264.43,51412.6 ; C105.1@55350.11,51380 R105.2@55264.43,51387.4 ; C105.1@55350.11,51420 R105.2@55264.43,51412.6 ; C105.1@55365.23,51391.08 J102.3@55331.05,51311.31 ; C105.1@55365.87,51398.04 J102.3@55368.95,51311.31 ; J102.3@55369.88,51307.22 C105.1@55350,51395 ; R105.2@55264.43,51387.4 C105.1@55350,51396 ; J102.3@55331.05,51311.31 C105.1@55350,51396 ; J102.3@55350,51310 C105.1@55350,51396 ; J102.3@55350,51310 55334.07,51394.51 J102.3@55350,51310 ; J102.3@55350,51310 55365.93,51394.51 J102.3@55350,51310 ; J102.3@55350,51310 C105.1@55350,51396 ; C105.1@55350,51396 J102.3@55368.95,51311.31
NetD1_2: D1.2 R2.2 R2.4 | length 1389.8
  TopLayer w10: R2.2@53500,50375 R2.4@53600,50375 53650,50425 53650,50550 53675,50575 D1.2@53750,50575 ; R2.2@53500.91,50365.04 53555,50375 ; R2.2@53500.91,50384.96 53555,50375 ; R2.2@53503.64,50355.33 53555,50375 ; R2.2@53503.64,50394.67 53555,50375 ; R2.4@53588.74,50396.18 53646.8,50421.8 ; R2.4@53593.52,50387.32 53646.8,50421.8 ; R2.4@53596.19,50354.77 53544.41,50375 ; R2.4@53596.19,50395.23 53544.41,50375 ; R2.4@53598.99,50364.46 53544.41,50375 ; R2.4@53598.99,50385.54 53544.41,50375 ; R2.4@53600,50378.94 53646.8,50421.8 ; R2.4@53607.78,50371.75 53646.8,50421.8 ; R2.4@53616.19,50366.21 53646.8,50421.8 ; D1.2@53746.06,50554.37 53694,50575 ; D1.2@53746.06,50595.63 53694,50575 ; D1.2@53748.92,50564.05 53694,50575 ; D1.2@53748.92,50585.95 53694,50575
NetD2_2: D2.2 R3.2 R3.4 | length 880
  TopLayer w10: R3.2@53500,50475 53550,50475 ; R3.2@53501,50465.05 53550,50475 ; R3.2@53501,50484.95 53550,50475 ; R3.2@53504,50455.4 53550,50475 ; R3.2@53504,50494.6 53550,50475 ; D2.2@53529.37,50567.06 53550,50515 ; D2.2@53539.05,50569.92 53550,50515 ; D2.2@53550,50571 53550,50515 ; D2.2@53550,50575 53550,50475 ; D2.2@53560.95,50569.92 53550,50515 ; D2.2@53570.63,50567.06 53550,50515 ; R3.4@53595.76,50454.85 53550,50475 ; R3.4@53595.76,50495.15 53550,50475 ; R3.4@53598.88,50464.47 53550,50475 ; R3.4@53598.88,50485.53 53550,50475 ; R3.4@53600,50475 53550,50475
NetD4_1: D4.1 D4.3 Q5.3 Sp1.2 Sp1.3 | length 2824.5
  BottomLayer w20: Q5.3@52797.23,49635.26 52892.54,49625 ; 52800,49625 D4.1@52950,49625 52950,49715 ; Q5.3@52800,49650 52892.54,49625 ; Q5.3@52805.03,49664.13 52892.54,49625 ; D4.1@52930.12,49627.22 52950,49715 ; D4.1@52947.78,49605.12 52860,49625 D4.1@52947.78,49644.88 ; D4.1@52950,49600 52950,49725 52975,49750 Sp1.2@53200,49750 ; D4.1@52969.88,49627.22 52950,49715 ; Sp1.3@53097.41,49771.18 53008.91,49750 ; Sp1.3@53097.57,49729.46 53008.91,49750 ; Sp1.3@53102.26,49729.46 Sp1.2@53190.91,49750 ; Sp1.3@53102.41,49771.18 Sp1.2@53190.91,49750 ; Sp1.2@53193.26,49730.11 Sp1.3@53110.27,49769.3 ; Sp1.2@53193.39,49769.93 Sp1.3@53110.19,49731.3 ; Sp1.2@53197.51,49729.15 Sp1.3@53109,49750.3 ; Sp1.2@53197.58,49729.14 53109,49750 Sp1.2@53197.58,49770.86 ; Sp1.2@53197.65,49770.87 Sp1.3@53109,49750.3 ; Sp1.2@53201.9,49729.09 Sp1.3@53110.19,49731.3 ; Sp1.2@53202.04,49770.9 Sp1.3@53110.27,49769.3 ; 53008.91,49750 Sp1.3@53099.91,49750.33 Sp1.2@53190.91,49750 ; Sp1.3@53109,49750.3 Sp1.2@53200,49750 ; Sp1.3@53110.19,49731.3 Sp1.2@53200,49750 ; Sp1.3@53110.27,49769.3 Sp1.2@53200,49750
NetD5_2: D5.2 D5.4 S5.3 S5.8 | length 3549.8
  TopLayer w10: D5.4@54305.65,52602.92 54325,52661.42 ; D5.4@54315.48,52600.54 54325,52661.42 ; D5.4@54330,52600 54325,52661.42 ; D5.4@54344.17,52576.3 D5.2@54393.75,52575.79 ; D5.4@54344.17,52623.7 D5.2@54393.75,52624.21 ; D5.4@54344.24,52602.88 54325,52661.42 ; D5.4@54345.31,52586.42 D5.2@54393.75,52575.79 ; D5.4@54345.31,52613.58 D5.2@54393.75,52624.21 ; D5.4@54348.2,52585.65 D5.2@54397.75,52585.17 ; D5.4@54348.2,52614.35 D5.2@54397.75,52614.83 ; D5.4@54349.15,52575.51 D5.2@54397.75,52585.17 ; D5.4@54349.15,52624.49 D5.2@54397.75,52614.83 ; D5.4@54352.6,52585.63 D5.2@54400,52600 ; D5.4@54352.6,52614.37 D5.2@54400,52600 ; D5.4@54353.56,52606.82 54325,52661.42 ; D5.4@54356.55,52576.24 D5.2@54400,52600 ; D5.4@54356.55,52623.76 D5.2@54400,52600 ; D5.4@54356.81,52586.93 D5.2@54397.75,52614.83 ; D5.4@54356.81,52613.07 D5.2@54397.75,52585.17 ; D5.4@54359.34,52588.5 D5.2@54393.75,52624.21 ; D5.4@54359.34,52611.5 D5.2@54393.75,52575.79 ; D5.4@54363.38,52579.14 D5.2@54397.75,52614.83 ; D5.4@54363.38,52620.86 D5.2@54397.75,52585.17 ; D5.4@54367.37,52582.22 D5.2@54393.75,52624.21 ; D5.4@54367.37,52617.78 D5.2@54393.75,52575.79 ; S5.8@54393.24,52924.89 54350,52950 ; S5.8@54393.24,52975.11 54350,52950 ; S5.8@54397.44,52934.21 54350,52950 ; S5.8@54397.44,52965.79 54350,52950 ; S5.8@54399.64,52944.01 54350,52950 ; S5.8@54399.64,52955.99 54350,52950 ; S5.8@54400,52950 54350,52950 ; D5.4@54350,52600 D5.2@54397.75,52614.83 ; D5.4@54350,52600 D5.2@54397.75,52585.17 ; D5.4@54350,52600 D5.2@54393.75,52624.21 ; D5.4@54350,52600 D5.2@54393.75,52575.79 ; D5.4@54350,52600 D5.2@54400,52600 ; D5.4@54350,52600 54325,52625 54325,52925 54350,52950 ; D5.4@54350.47,52600 D5.2@54397.75,52614.83 ; D5.4@54350.47,52600 D5.2@54397.75,52585.17 ; D5.4@54350.47,52600 D5.2@54400,52600 ; D5.4@54350.47,52600 D5.2@54393.75,52624.21 ; D5.4@54350.47,52600 D5.2@54393.75,52575.79
  BottomLayer w10: S5.3@54100,52950 S5.8@54400,52950 ; S5.3@54100.3,52944.01 54161,52950 ; S5.3@54100.3,52955.99 54161,52950 ; S5.3@54102.1,52934.14 54161,52950 ; S5.3@54102.1,52965.86 54161,52950 ; S5.3@54105.54,52924.6 54161,52950 ; S5.3@54105.54,52975.4 54161,52950 ; S5.8@54394.46,52924.6 54339,52950 ; S5.8@54394.46,52975.4 54339,52950 ; S5.8@54397.9,52934.14 54339,52950 ; S5.8@54397.9,52965.86 54339,52950 ; S5.8@54399.7,52944.01 54339,52950 ; S5.8@54399.7,52955.99 54339,52950
NetD6_2: D6.2 D6.4 S6.3 S6.8 | length 3549.8
  TopLayer w10: D6.4@54705.65,52602.92 54725,52661.42 ; D6.4@54715.48,52600.54 54725,52661.42 ; D6.4@54730,52600 54725,52661.42 ; D6.4@54744.17,52576.3 D6.2@54793.75,52575.79 ; D6.4@54744.17,52623.7 D6.2@54793.75,52624.21 ; D6.4@54744.24,52602.88 54725,52661.42 ; D6.4@54745.31,52586.42 D6.2@54793.75,52575.79 ; D6.4@54745.31,52613.58 D6.2@54793.75,52624.21 ; D6.4@54748.2,52585.65 D6.2@54797.75,52585.17 ; D6.4@54748.2,52614.35 D6.2@54797.75,52614.83 ; D6.4@54749.15,52575.51 D6.2@54797.75,52585.17 ; D6.4@54749.15,52624.49 D6.2@54797.75,52614.83 ; D6.4@54752.6,52585.63 D6.2@54800,52600 ; D6.4@54752.6,52614.37 D6.2@54800,52600 ; D6.4@54753.56,52606.82 54725,52661.42 ; D6.4@54756.55,52576.24 D6.2@54800,52600 ; D6.4@54756.55,52623.76 D6.2@54800,52600 ; D6.4@54756.81,52586.93 D6.2@54797.75,52614.83 ; D6.4@54756.81,52613.07 D6.2@54797.75,52585.17 ; D6.4@54759.34,52588.5 D6.2@54793.75,52624.21 ; D6.4@54759.34,52611.5 D6.2@54793.75,52575.79 ; D6.4@54763.38,52579.14 D6.2@54797.75,52614.83 ; D6.4@54763.38,52620.86 D6.2@54797.75,52585.17 ; D6.4@54767.37,52582.22 D6.2@54793.75,52624.21 ; D6.4@54767.37,52617.78 D6.2@54793.75,52575.79 ; S6.8@54793.24,52924.89 54750,52950 ; S6.8@54793.24,52975.11 54750,52950 ; S6.8@54797.44,52934.21 54750,52950 ; S6.8@54797.44,52965.79 54750,52950 ; S6.8@54799.64,52944.01 54750,52950 ; S6.8@54799.64,52955.99 54750,52950 ; S6.8@54800,52950 54750,52950 ; D6.4@54750,52600 D6.2@54797.75,52614.83 ; D6.4@54750,52600 D6.2@54797.75,52585.17 ; D6.4@54750,52600 D6.2@54793.75,52624.21 ; D6.4@54750,52600 D6.2@54793.75,52575.79 ; D6.4@54750,52600 D6.2@54800,52600 ; D6.4@54750,52600 54725,52625 54725,52925 54750,52950 ; D6.4@54750.47,52600 D6.2@54797.75,52614.83 ; D6.4@54750.47,52600 D6.2@54797.75,52585.17 ; D6.4@54750.47,52600 D6.2@54800,52600 ; D6.4@54750.47,52600 D6.2@54793.75,52624.21 ; D6.4@54750.47,52600 D6.2@54793.75,52575.79
  BottomLayer w10: S6.3@54500,52950 S6.8@54800,52950 ; S6.3@54500.3,52944.01 54561,52950 ; S6.3@54500.3,52955.99 54561,52950 ; S6.3@54502.1,52934.14 54561,52950 ; S6.3@54502.1,52965.86 54561,52950 ; S6.3@54505.54,52924.6 54561,52950 ; S6.3@54505.54,52975.4 54561,52950 ; S6.8@54794.46,52924.6 54739,52950 ; S6.8@54794.46,52975.4 54739,52950 ; S6.8@54797.9,52934.14 54739,52950 ; S6.8@54797.9,52965.86 54739,52950 ; S6.8@54799.7,52944.01 54739,52950 ; S6.8@54799.7,52955.99 54739,52950
NetD7_2: D7.2 D7.4 S7.3 S7.8 | length 4581.8
  TopLayer w10: D7.4@55105.65,52602.92 55125,52661.42 ; D7.4@55115.48,52600.54 55125,52661.42 ; D7.4@55130,52600 55125,52661.42 ; D7.4@55144.17,52576.3 D7.2@55193.75,52575.79 ; D7.4@55144.17,52623.7 D7.2@55193.75,52624.21 ; D7.4@55144.24,52602.88 55125,52661.42 ; D7.4@55145.31,52586.42 D7.2@55193.75,52575.79 ; D7.4@55145.31,52613.58 D7.2@55193.75,52624.21 ; D7.4@55148.2,52585.65 D7.2@55197.75,52585.17 ; D7.4@55148.2,52614.35 D7.2@55197.75,52614.83 ; D7.4@55149.15,52575.51 D7.2@55197.75,52585.17 ; D7.4@55149.15,52624.49 D7.2@55197.75,52614.83 ; D7.4@55152.6,52585.63 D7.2@55200,52600 ; D7.4@55152.6,52614.37 D7.2@55200,52600 ; D7.4@55153.56,52606.82 55125,52661.42 ; D7.4@55156.55,52576.24 D7.2@55200,52600 ; D7.4@55156.55,52623.76 D7.2@55200,52600 ; D7.4@55156.81,52586.93 D7.2@55197.75,52614.83 ; D7.4@55156.81,52613.07 D7.2@55197.75,52585.17 ; D7.4@55159.34,52588.5 D7.2@55193.75,52624.21 ; D7.4@55159.34,52611.5 D7.2@55193.75,52575.79 ; D7.4@55163.38,52579.14 D7.2@55197.75,52614.83 ; D7.4@55163.38,52620.86 D7.2@55197.75,52585.17 ; D7.4@55167.37,52582.22 D7.2@55193.75,52624.21 ; D7.4@55167.37,52617.78 D7.2@55193.75,52575.79 ; S7.8@55193.24,52924.89 55150,52950 ; S7.8@55193.24,52975.11 55150,52950 ; S7.8@55197.44,52934.21 55150,52950 ; S7.8@55197.44,52965.79 55150,52950 ; S7.8@55199.64,52944.01 55150,52950 ; S7.8@55199.64,52955.99 55150,52950 ; S7.8@55200,52950 55150,52950 ; D7.4@55150,52600 D7.2@55197.75,52614.83 ; D7.4@55150,52600 D7.2@55197.75,52585.17 ; D7.4@55150,52600 D7.2@55193.75,52624.21 ; D7.4@55150,52600 D7.2@55193.75,52575.79 ; D7.4@55150,52600 D7.2@55200,52600 ; D7.4@55150,52600 55125,52625 55125,52925 55150,52950 ; D7.4@55150.47,52600 D7.2@55197.75,52614.83 ; D7.4@55150.47,52600 D7.2@55197.75,52585.17 ; D7.4@55150.47,52600 D7.2@55200,52600 ; D7.4@55150.47,52600 D7.2@55193.75,52624.21 ; D7.4@55150.47,52600 D7.2@55193.75,52575.79
  BottomLayer w10: 54961,52950 54900.3,52944.01 54961,52950 ; 54961,52950 54900.3,52955.99 54961,52950 ; 54961,52950 54902.1,52934.14 54961,52950 ; 54961,52950 54902.1,52965.86 54961,52950 ; 54961,52950 54905.54,52924.6 54961,52950 ; 54961,52950 54905.54,52975.4 54961,52950 ; 55139,52950 55199.7,52955.99 55139,52950 ; 55139,52950 55199.7,52944.01 55139,52950 ; 55139,52950 55197.9,52965.86 55139,52950 ; 55139,52950 55197.9,52934.14 55139,52950 ; 55139,52950 55194.46,52975.4 55139,52950 ; 55139,52950 55194.46,52924.6 55139,52950 ; S7.3@54900,52950 S7.8@55200,52950 S7.3@54900,52950
NetD8_2: D8.2 D8.4 S8.3 S8.8 | length 2038.1
  TopLayer w10: D8.4@55505.66,52602.99 55525,52659.95 ; D8.4@55515.48,52600.55 55525,52659.95 ; D8.4@55525,52605 55525,52925 55550,52950 ; D8.4@55530,52600 55525,52659.95 ; D8.4@55544.23,52602.95 55525,52659.95 ; D8.4@55553.51,52606.98 55525,52659.95 ; S8.8@55593.24,52924.89 55550,52950 ; S8.8@55593.24,52975.11 55550,52950 ; S8.8@55597.44,52934.21 55550,52950 ; S8.8@55597.44,52965.79 55550,52950 ; S8.8@55599.64,52944.01 55550,52950 ; S8.8@55599.64,52955.99 55550,52950 ; S8.8@55600,52950 55550,52950
  BottomLayer w10: S8.3@55300,52950 S8.8@55600,52950 ; S8.3@55300.3,52944.01 55361,52950 ; S8.3@55300.3,52955.99 55361,52950 ; S8.3@55302.1,52934.14 55361,52950 ; S8.3@55302.1,52965.86 55361,52950 ; S8.3@55305.54,52924.6 55361,52950 ; S8.3@55305.54,52975.4 55361,52950 ; S8.8@55594.46,52924.6 55539,52950 ; S8.8@55594.46,52975.4 55539,52950 ; S8.8@55597.9,52934.14 55539,52950 ; S8.8@55597.9,52965.86 55539,52950 ; S8.8@55599.7,52944.01 55539,52950 ; S8.8@55599.7,52955.99 55539,52950
NetD9_2: D9.2 R6.2 R6.4 | length 1111.4
  TopLayer w10: D9.2@54729.37,50171.06 54750,50119 ; R6.4@54729.77,49953.81 54750,50005.59 ; R6.2@54730.33,50046.36 54750,49995 ; R6.2@54730.33,50053.64 54750,50105 ; D9.2@54739.05,50173.92 54750,50119 ; R6.4@54739.46,49951.01 54750,50005.59 ; R6.2@54740.04,50049.09 54750,49995 ; R6.2@54740.04,50050.91 54750,50105 ; R6.4@54750,49950 R6.2@54750,50050 D9.2@54750,50175 ; R6.2@54759.96,50049.09 54750,49995 ; R6.2@54759.96,50050.91 54750,50105 ; R6.4@54760.54,49951.01 54750,50005.59 ; D9.2@54760.95,50173.92 54750,50119 ; R6.2@54769.67,50046.36 54750,49995 ; R6.2@54769.67,50053.64 54750,50105 ; R6.4@54770.23,49953.81 54750,50005.59 ; D9.2@54770.63,50171.06 54750,50119